# Altium PCB Mini_Converter_2024-05-02.pcbdoc
Units mil, origin at the board's own origin, x right, y up, seen from the top; angles counter-clockwise.
Board outline 1802.67 x 1741.37 mil, 2 copper layers (Top Layer, Bottom Layer); 14 components, 11 nets, 34 pads, 51 vias.
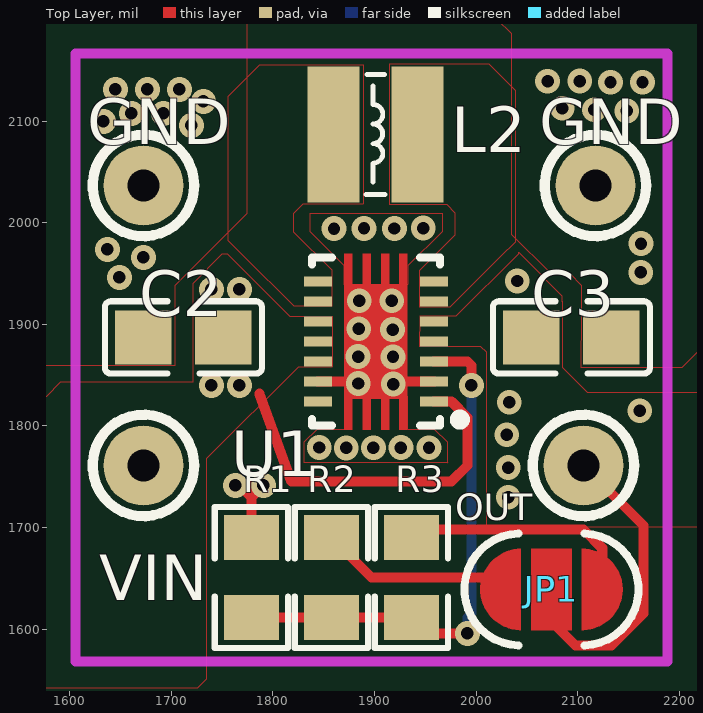
[diagram p0: Top Layer view]
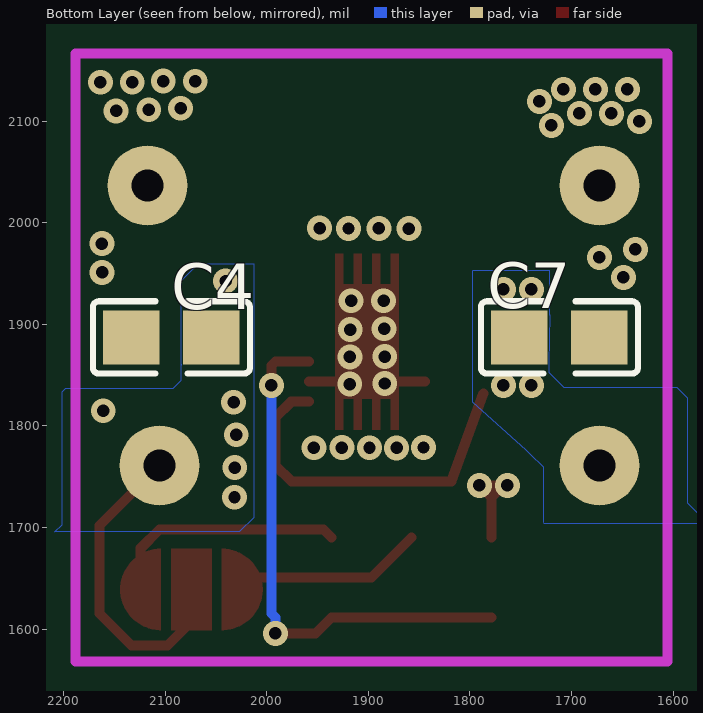
[diagram p1: Bottom Layer view, seen from below]

## Layer stack, top to bottom
Top Layer: signal copper (thickness not stored)
Dielectric: dielectric 12.6, FR-4, Dk 4.8
Bottom Layer: signal copper (thickness not stored)

## Board outline
2802.67,1000 1000,1000 1000,2741.37 2802.67,2741.37

## Components (designator, comment, footprint, x,y, rotation, side; value= is the part's Value field where it differs from the comment)
C2 "10u" C0805#1 1711.94,1887.04 r0 top
C3 "22uF" C0805#1 2093.83,1887.04 r180 top
C4 "22uF" C0805#2 2093.83,1887.04 r0 bottom
C7 "100n" C0805#2 1711.94,1887.04 r180 bottom
GND "GND" PKG-TEST-POINT-PTH-1X1 1672.57,2036.65 r0 top
GND "GND" PKG-TEST-POINT-PTH-1X1 2117.45,2036.65 r0 top
JP1 "3.3V/5V" "SOLDER BRIDGE 3P UNBRIDGED" 2074.14,1639.01 r180 top
L2 "1.5uH" IND-SMD_L3.0-W3.0-SPM3020-2R2M 1900.76,2086.84 r0 top
OUT "VOUT" PKG-TEST-POINT-PTH-1X1 2105.64,1761.06 r0 top
R1 "180k" R0805 1778.87,1650.82 r90 top
R2 "1M" R0805 1857.61,1650.82 r270 top
R3 "1.6M" R0805 1936.35,1650.82 r270 top
U1 "TPS63020DSJR" VSON-14_L4.0-W3.0-P0.50-BL-EP_TI_DSJ 1901.31,1882.95 r90 top
VIN "VIN" PKG-TEST-POINT-PTH-1X1 1672.57,1761.06 r0 top

## Footprints (in the part's own frame and the unit in brackets; to place one, negate y for a bottom-side part, rotate by r counter-clockwise, add the part's x,y. Pads: shape width x height; smd on the part's side, far side on the other; paste and mask are expansions set on the pad)
C0805#1 [mm]
  rect 1.41x1.35 smd paste-100 mask+0.051: 1(-1,0) 2(1,0)
  silkscreen extent -1.96,-0.9 1.96,0.9
C0805#2 [mm]
  rect 1.41x1.35 smd paste-100 mask+0.051: 1(1,0) 2(-1,0)
  silkscreen extent -1.96,-0.9 1.96,0.9
IND-SMD_L3.0-W3.0-SPM3020-2R2M [mm]
  rect 1.3x3.4 smd paste+0 mask+0.051: 1(1.05,0) 2(-1.05,0)
  silkscreen extent -0.23,-1.5 0.25,1.5
PKG-TEST-POINT-PTH-1X1 [mm]
  round 2 hole 0.8 paste+0 mask+0.102: 1(0,0)
  silkscreen extent -1.27,-1.27 1.27,1.27
R0805 [mil]
  rect 44.59x54.21 smd paste-3937.01 mask+2: 1(-39.37,0) 2(39.37,0)
  silkscreen extent -69,-36 69,36
"SOLDER BRIDGE 3P UNBRIDGED" [mil]
  Top Layer region: -20,40 20,40 20,-40 -20,-40
  Top Layer region: 30,-40 31.79,-39.96 33.59,-39.84 35.37,-39.64 37.14,-39.36 38.9,-39 40.64,-38.56 42.36,-38.04 44.05,-37.45 45.72,-36.78 47.35,-36.04 48.95,-35.22 50.52,-34.34 52.04,-33.38 53.51,-32.36 54.94,-31.27 56.32,-30.12 57.64,-28.91 58.91,-27.64 60.12,-26.32 61.27,-24.94 62.36,-23.51 63.38,-22.04 64.34,-20.52 65.22,-18.96 66.04,-17.36 66.78,-15.72 67.45,-14.06 68.04,-12.36 68.56,-10.64 69,-8.9 69.36,-7.14 69.64,-5.37 69.84,-3.59 69.96,-1.8 70,0 69.96,1.79 69.84,3.59 69.64,5.37 69.36,7.14 69,8.9 68.56,10.64 68.04,12.36 67.45,14.05 66.78,15.72 66.04,17.36 65.22,18.95 64.34,20.52 63.38,22.04 62.36,23.51 61.27,24.94 60.12,26.32 58.91,27.64 57.64,28.91 56.32,30.12 54.94,31.27 53.51,32.36 52.04,33.38 50.52,34.34 48.95,35.22 47.35,36.04 45.72,36.78 44.05,37.45 42.36,38.04 40.64,38.56 38.9,39 37.14,39.36 35.37,39.64 33.59,39.84 31.79,39.96 30,40
  Top Layer region: -30,40 -31.8,39.96 -33.59,39.84 -35.37,39.64 -37.14,39.36 -38.9,39 -40.64,38.56 -42.36,38.04 -44.06,37.45 -45.72,36.78 -47.36,36.04 -48.96,35.22 -50.52,34.34 -52.04,33.38 -53.51,32.36 -54.94,31.27 -56.32,30.12 -57.64,28.91 -58.91,27.64 -60.12,26.32 -61.27,24.94 -62.36,23.51 -63.38,22.04 -64.34,20.52 -65.22,18.95 -66.04,17.36 -66.78,15.72 -67.45,14.05 -68.04,12.36 -68.56,10.64 -69,8.9 -69.36,7.14 -69.64,5.37 -69.84,3.59 -69.96,1.79 -70,0 -69.96,-1.8 -69.84,-3.59 -69.64,-5.37 -69.36,-7.14 -69,-8.9 -68.56,-10.64 -68.04,-12.36 -67.45,-14.06 -66.78,-15.72 -66.04,-17.36 -65.22,-18.96 -64.34,-20.52 -63.38,-22.04 -62.36,-23.51 -61.27,-24.94 -60.12,-26.32 -58.91,-27.64 -57.64,-28.91 -56.32,-30.12 -54.94,-31.27 -53.51,-32.36 -52.04,-33.38 -50.52,-34.34 -48.96,-35.22 -47.36,-36.04 -45.72,-36.78 -44.06,-37.45 -42.36,-38.04 -40.64,-38.56 -38.9,-39 -37.14,-39.36 -35.37,-39.64 -33.59,-39.84 -31.8,-39.96 -30,-40
  silkscreen extent -86,-55 86,55
VSON-14_L4.0-W3.0-P0.50-BL-EP_TI_DSJ [mm]
  rect 0.25x0.7 smd paste+0 mask+0.051: 1(-1.5,-1.45) 2(-1,-1.45) 3(-0.5,-1.45) 4(0,-1.45) 5(0.5,-1.45) 6(1,-1.45) 7(1.5,-1.45) 8(1.5,1.45) 9(1,1.45) 10(0.5,1.45) 11(0,1.45) 12(-0.5,1.45) 13(-1,1.45) 14(-1.5,1.45)
  Top Layer region: -2.2,0.79 -2.2,0.59 -1.43,0.59 -1.43,0.33 -2.2,0.33 -2.2,0.13 -1.43,0.13 -1.43,-0.13 -2.2,-0.13 -2.2,-0.33 -1.43,-0.33 -1.43,-0.59 -2.2,-0.59 -2.2,-0.79 2.2,-0.79 2.2,-0.59 1.43,-0.59 1.43,-0.33 2.2,-0.33 2.2,-0.13 1.43,-0.13 1.43,0.13 2.2,0.13 2.2,0.33 1.43,0.33 1.43,0.59 2.2,0.59 2.2,0.79
  silkscreen extent -2.1,-2.23 2.1,1.6

## Via types
v1: diameter 24.41, hole 12.2, Top Layer to Bottom Layer, tented both sides, 51 vias

## Nets (pads, with @x,y where several pads share a name; then routed paths per layer and width w, separated by ;. In a path a pad name is that pad's centre, name@x,y a point inside that pad or via, vN(x,y) a via of type N, cw(c..) or ccw(c..) an arc to the next point about the centre after c; other vN are vias at no path point)
GND: C2.1 C3.1 C4.1 C7.1 GND.1 R1.2 U1.2 U1.13 | length 185.8
  Top Layer w10: R1.2 1778.87,1729.57 ; U1.13 1882.06,1843.59 v1(1883.9,1841.73) ; v1(1918.39,1841.11) 1920.88,1843.59 U1.2 ; 1778.87,1729.57 1767.06,1741.38 v1(1763.12,1741.38) v1(1790.68,1741.38) 1778.87,1729.57
  other v1: 1872.23,1778.33 1898.92,1778.43 1845.69,1778.74 1926.02,1778.58 1953.6,1778.57 1883.83,1868.22 1918.2,1867.89 1917.77,1894.79 1884.52,1895.53 1884.99,1923.07 1917.02,1923.09 1648.95,1946.1 2162.06,1951.09 1672.57,1965.79 1637.14,1973.65 2162.27,1979.43 1860.11,1994.19 1889.63,1994.4 1919.59,1994.28 1947.96,1994.67 1719.81,2095.7 1633.2,2099.64 1660.76,2107.51 1692.25,2107.51 2148.34,2109.97 2116.24,2111.09 2084.84,2112.57 1731.62,2119.32 1645.01,2131.14 1676.51,2131.14 1708,2131.14 2132.31,2138.28 2163.76,2138.14 2070.34,2139.22 2101.93,2139.39
JP1_1: R3.1 | length 239.3
  Top Layer w10: R3.1 1944.22,1698.07 2105.64,1698.07 2124.14,1679.56 2124.14,1639.01
JP1_2: R2.1 | length 187.7
  Top Layer w10: R2.1 1896.98,1650.82 2012.33,1650.82 2024.14,1639.01
R3_2: R1.1 R2.2 R3.2 U1.3 | length 523.2
  Top Layer w10: R1.1 R2.2 R3.2 1952.1,1595.71 v1(1991.47,1595.7) ; U1.3 1991.47,1863.42 1995.4,1859.49 v1(1995.4,1839.81)
  Bottom Layer w10: v1(1991.47,1595.7) 1991.47,1611.45 1995.4,1615.39 v1(1995.4,1839.81)
S$1699: 
S$1703: 
TP3_1: C3.2 C4.2 OUT.1 U1.4 U1.5 | length 315
  Top Layer w10: 2074.14,1639.01 2074.14,1607.52 2097.77,1583.89 2133.2,1583.89 2164.7,1615.39 2164.7,1702.01 OUT.1
  other v1: 2031.72,1729.71 2031.58,1758.97 2030.1,1791.26 2161.03,1814.93 2032.65,1823.32 2040.49,1942.61
U1_6: L2.1 U1.6 U1.7
U1_8: L2.2 U1.8 U1.9
U1_14: U1.14
VCC: C2.2 C7.2 U1.1 U1.10 U1.11 U1.12 VIN.1 | length 358.7
  Top Layer w10: 1786.74,1831.93 1818.24,1745.31 1975.71,1745.36 1991.51,1761.06 1991.51,1808.26 1975.91,1823.86 U1.1
  other v1: 1739.5,1839.81 1767.06,1839.81 1739.5,1934.29 1767.06,1934.29

## Polygon pours and split planes (outlines as drawn)
TP3_1 on Bottom Layer (solid): 2084.3,1859.51 2084.3,1942.84 2067.63,1959.51 2012.82,1959.51 2012.65,1959.34 2012.65,1709.79 2026.86,1695.58 2208.7,1695.58 2201.48,1702.8 2201.48,1833.47 2197.77,1837.17 2092.22,1837.17 2084.25,1844.95 2084.25,1860.51
VCC on Bottom Layer (solid): 1721.14,1908.94 1721.32,1909.13 1721.32,1952.64 1721.51,1952.46 1797.43,1952.46 1797.82,1952.08 1797.82,1823.58 1745.08,1776.44 1740.98,1772.57 1728.02,1759.61 1728.02,1705.17 1727.28,1704.06 1565.43,1704.06 1585.43,1724.06 1585.43,1827.39 1595.8,1837.76 1707.28,1837.76 1721.72,1852.2 1721.72,1861.46
GND on Bottom Layer (solid): 1550.67,2208 1556,2202.67 2302.67,2202.67 2285.33,2185.33 2285.33,1506.67 2278.67,1500 1537.33,1500 1517.33,1520 1500,1520
GND on Top Layer (solid): 1870.09,1938.72 1869.99,1957.23 1869.99,1957.79 1836.66,1991.12 1836.66,2009.08 1966.47,2009.27 1966.66,2009.08 1966.66,1991.49 1966.63,1991.34 1966.63,1991.29 1932.59,1957.79 1932.59,1939.64 1932.03,1939.08
U1_8 on Top Layer (solid): 1888.77,2155.6 1888.77,2018.42 1888.45,2018.11 1829.38,2018.11 1820.23,2008.95 1820.23,1991.28 1858.07,1953.43 1858.07,1917.83 1857.87,1917.63 1830.31,1917.63 1830.18,1917.76 1820.92,1917.76 1803.7,1934.98 1803.54,1934.98 1788.76,1949.77 1788.76,1949.66 1756.03,1982.39 1756.03,2124.29 1786.98,2155.24
U1_6 on Top Layer (solid): 1914.35,2017.96 1971.08,2017.96 1979.06,2009.99 1979.06,1987.77 1943.96,1952.67 1943.96,1917.24 1944.02,1917.17 1974.58,1917.17 1984.8,1927.4 1984.81,1927.4 2024.43,1967.03 2024.43,1967.1 2038.78,1981.45 2038.78,2129.95 2012.78,2155.95 1914.66,2155.95 1914.49,2156.11
GND on Top Layer (solid): 1870.12,1826.72 1870.12,1796.37 1842.92,1796.37 1830.48,1783.92 1830.48,1763.96 1971.81,1763.96 1971.94,1763.83 1971.94,1783.69 1959.41,1796.23 1933.14,1796.23 1932.48,1796.89 1932.48,1828.49 1932.34,1828.63
GND on Top Layer (solid): 1704.07,1859.48 1704.07,1938.22 1774.93,2009.09 1774.93,2233.5 1782.81,2241.37 1582.02,2241.37 1562.33,2221.69 1562.33,1898.86 1522.96,1859.48
VCC on Top Layer (solid): 1721.43,1858.07 1721.43,1940.37 1750.3,1969.24 1755.03,1969.24 1816.53,1907.74 1858.2,1907.74 1858.2,1858.11 1858.01,1857.92 1825.08,1857.92 1734.57,1767.42 1734.57,1550.64 1725.77,1541.84 1520.58,1541.84 1508.73,1553.69 1508.73,1767.13 1570.85,1829.26 1577.16,1829.26 1591.11,1843.2 1721.38,1843.2
GND on Top Layer (solid): 2103.18,1857.84 2103.24,1857.78 2203.06,1857.78 2223.17,1877.89 2223.17,2216.69 2207.04,2200.55 2020.54,2200.55 2034.59,2186.51 2034.59,1988.52 2073.28,1950.19 2092.01,1950.19 2103.56,1938.64 2103.56,1910.34
TP3_1 on Top Layer (solid): 1944.88,1907.93 1945.14,1908.2 1980.61,1908.2 2041.91,1969.5 2041.91,1970.8 2084.5,1928.2 2084.5,1922.65 2084.61,1922.54 2084.61,1857.7 2109.35,1832.95 2220.2,1832.95 2227.97,1825.18 2227.97,1697.03 2224.64,1700.36 2007.97,1700.36 2010.32,1702.71 2010.32,1872.48 2004.76,1878.03 1944.39,1878.03